# EAGLE board PREAMP_PCB (EAGLE 6.3), part 1 of 3
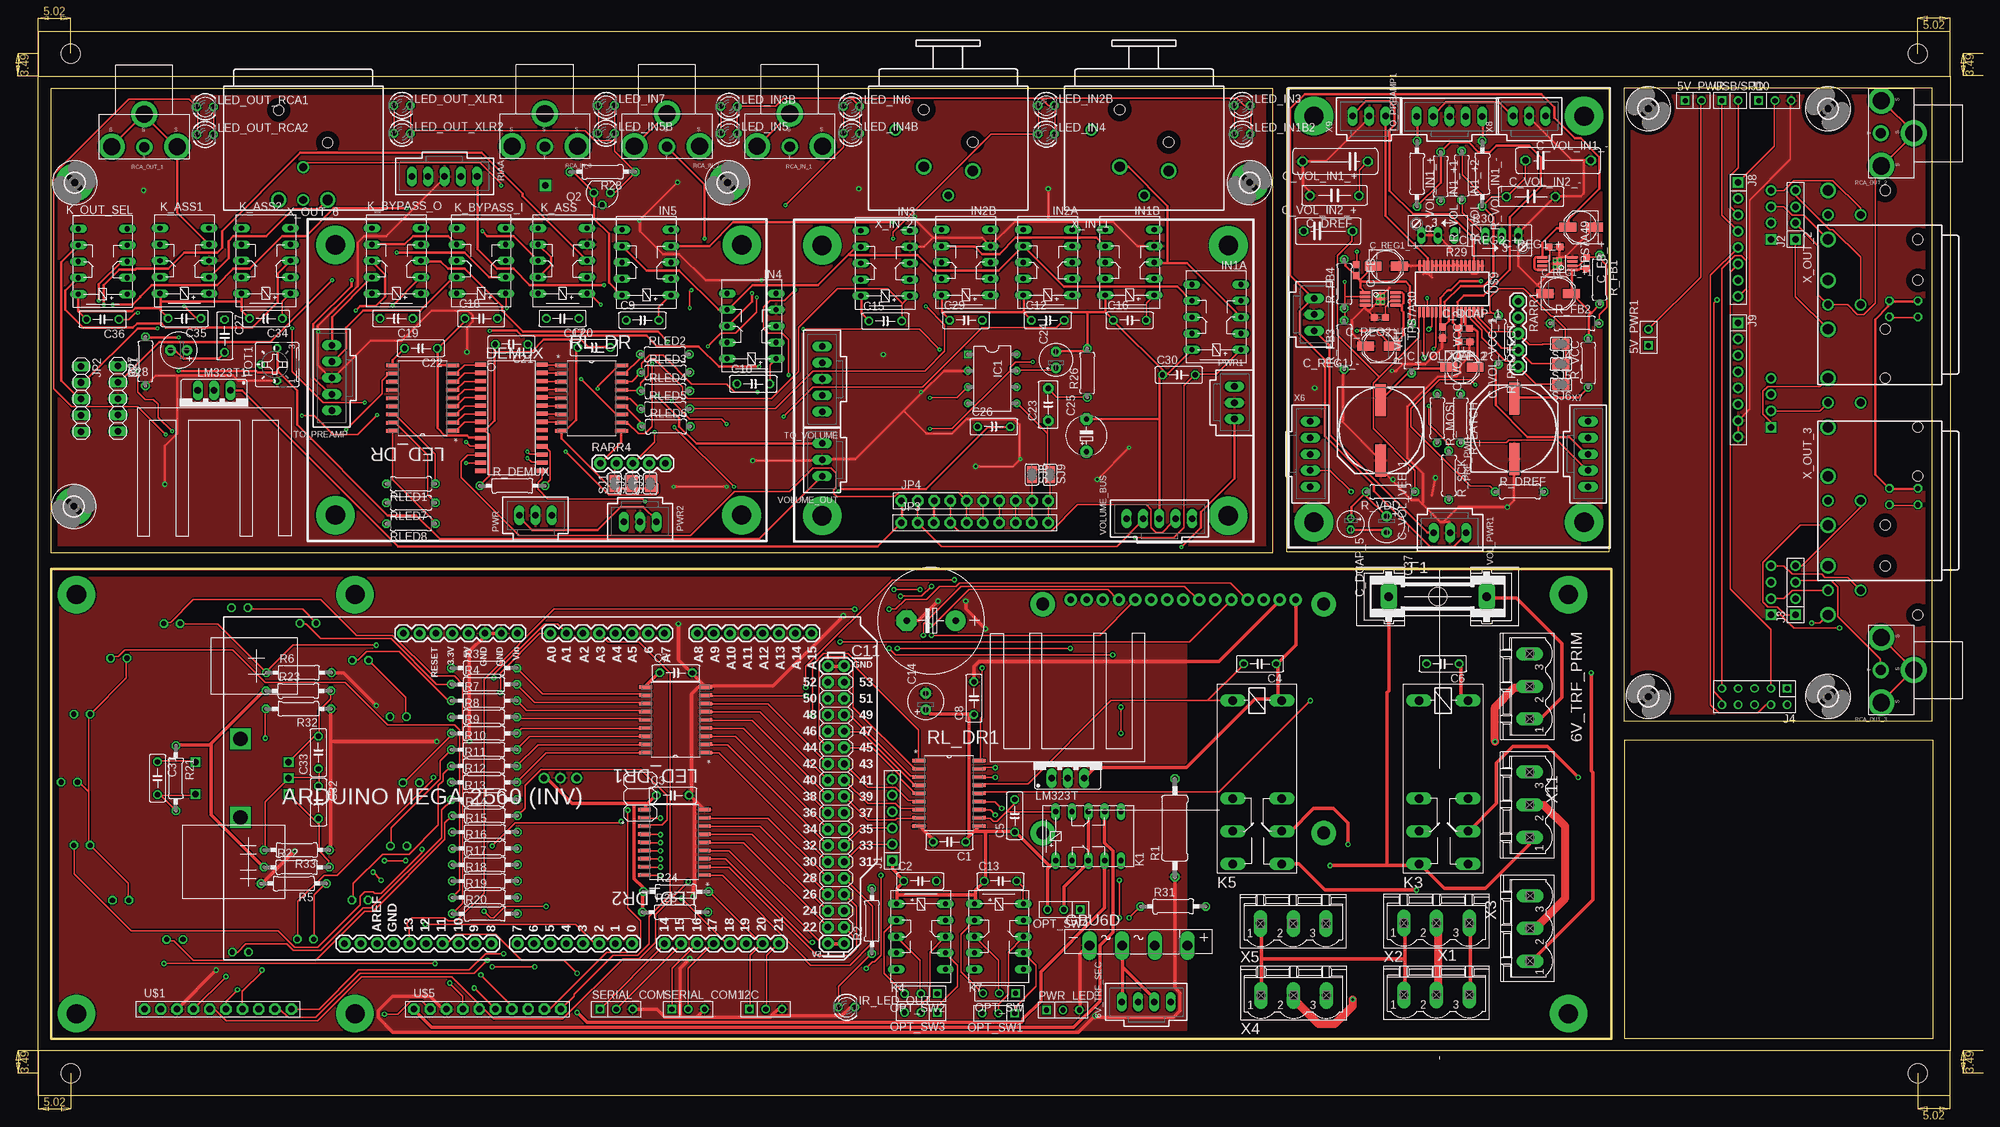
[diagram p0: board, top side]
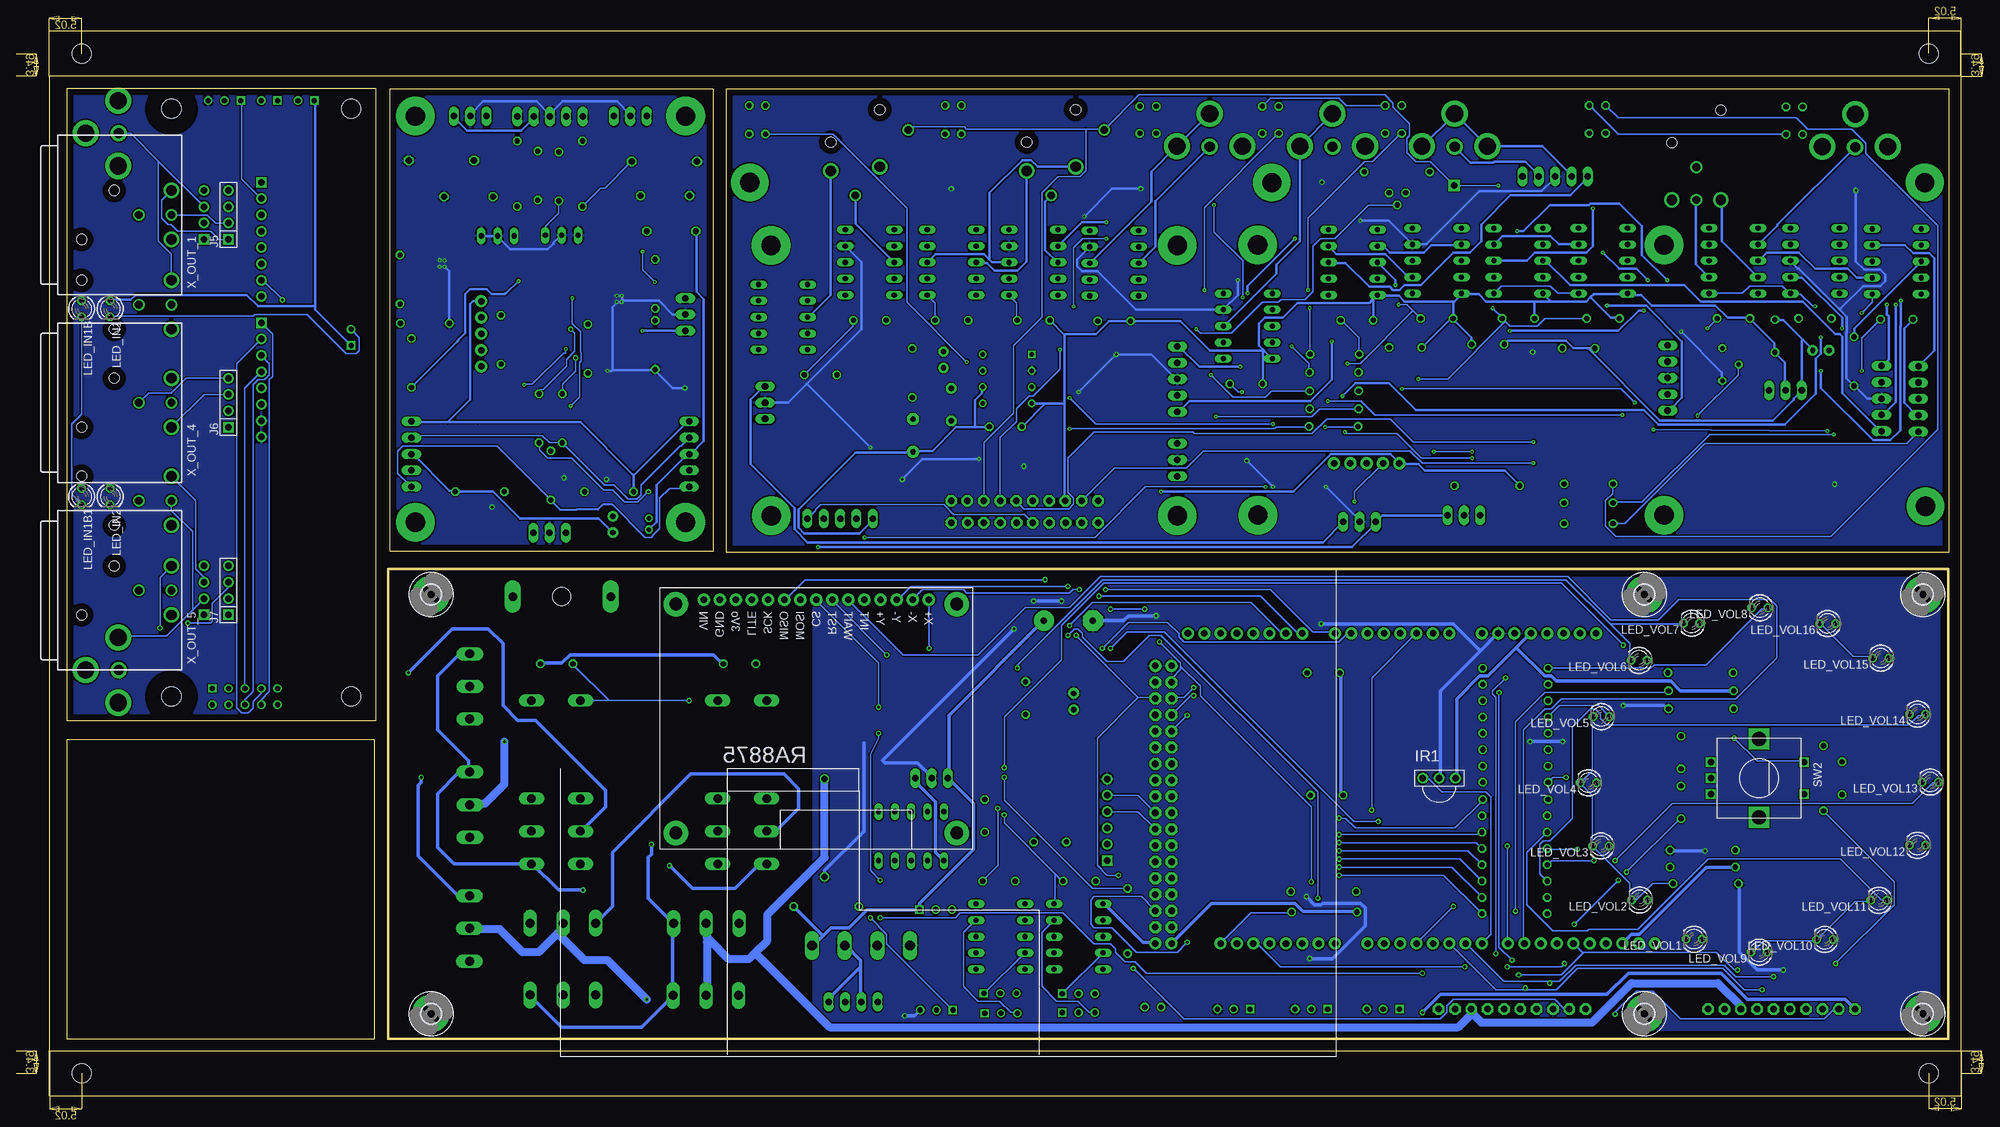
[diagram p1: board, bottom side, seen from below]

Size 297.38 x 165.6 mm. Coordinates in mm from the lower left corner, seen from the top.
Outline: 0.04,158.6 0.04,165.6
Outline: 297.34,158.55 297.34,165.55
Outline: 297.37,0 297.37,7
Outline: 0.01,0 0.01,7
Outline: 0.03,165.58 297.36,165.58
Outline: 297.38,0 0,0
Outline: 244.64,8.89 1.97,8.89 1.97,81.97 244.64,81.97 244.64,8.89
Outline: 246.61,156.72 246.61,58.31 294.54,58.31 294.54,156.72 246.61,156.72
Outline: 1.94,84.5 192.04,84.5 192.04,156.64 1.94,156.64 1.94,84.5
Outline: 194.08,156.65 194.08,84.67 244.37,84.67 244.37,156.65 194.08,156.65
Outline: 0.01,158.59 297.34,158.59 297.34,9.52 297.34,9.27 297.34,7.02 0.01,7.02 0.01,158.59
Outline: 246.74,55.37 294.61,55.37 294.61,9.27 294.61,8.89 246.74,8.89 246.74,55.37
Copper layers (1*16): Top 0.035mm / dielectric 1.5mm / Bottom 0.035mm
Design rules "default": minimum track width 10mil, minimum drill 24mil, track to track 8mil, track to pad 8mil, pad to pad 8mil, via to via 8mil, smd to smd 8mil, copper to edge 40mil, drill to drill 8mil, minimum pad ring 10mil, minimum via ring 8mil, stop-mask expansion 4mil, vias tented up to drill 0mil, thermal gap 10mil
Net classes: 0 default: width 0.203 mm, clearance 0.203 mm; 1 mains: width 0.508 mm, clearance 2.5 mm; 2 earth: width 1.27 mm, clearance 0.508 mm; 3 main2: width 0.508 mm, clearance 1.5 mm; 4 power: width 0.381 mm, clearance 0.203 mm
Holes 3 mm at 5.03,162.13 292.3,162.08 292.28,3.51 5.03,3.53 5.03,3.53

## Footprints (pad centres in the part's own frame; a part is rotated, then mirrored left to right if it is on the bottom)
M1X2 = drill 0.8 square: 1 -1.27,0 | drill 0.8: 2 1.27,0
MSTBV3 = drill 1.397 long: 1 -5.08,0; 2 0,0; 3 5.08,0
70543-04 = drill 1.016 long: 1 -3.81,0; 2 -1.27,0; 3 1.27,0; 4 3.81,0
C050-025X075 = drill 0.813 octagon: 1 -2.54,0; 2 2.54,0
E7,5-16 = drill 1.016 pad 3.15: + -3.81,0 | drill 1.016 pad 3.15 octagon: - 3.81,0
E2,5-6 = drill 0.813 pad 1.6: + -1.27,0 | drill 0.813 pad 1.6 octagon: - 1.27,0
C5B3 = drill 0.813 pad 1.6 octagon: 1 -2.54,0; 2 2.54,0
E2,5-5 = drill 0.813 pad 1.6: + -1.27,0 | drill 0.813 pad 1.6 octagon: - 1.27,0
E5-6 = drill 0.813 pad 1.905: + -2.54,0 | drill 0.813 pad 1.905 octagon: - 2.54,0
C0603 = smd 1.1 x 1: 1 -0.85,0; 2 0.85,0
PANASONIC_C = smd 2.6 x 1.4: + 2.05,0; - -2.05,0
E1,8-4 = drill 0.711 pad 1.168: + -0.889,0 | drill 0.711 pad 1.168 octagon: - 0.889,0
C075-042X103 = drill 0.914 octagon: 1 -3.81,0; 2 3.81,0
C102-043X133 = drill 1.016 octagon: 1 -5.08,0; 2 5.08,0
C075-032X103 = drill 0.914 octagon: 1 -3.81,0; 2 3.81,0
PANASONIC_H13 = smd 5 x 1.6: + 4.7,0; - -4.7,0
SO28W = smd 0.65 x 1.7: 1 -7.62,-4.78; 2 -6.35,-4.78; 3 -5.08,-4.78; 4 -3.81,-4.78; 5 -2.54,-4.78; 6 -1.27,-4.78; 7 0,-4.78; 8 1.27,-4.78; 9 2.54,-4.78; 10 3.81,-4.78; 11 5.08,-4.78; 12 6.35,-4.78; 13 7.62,-4.78; 14 8.89,-4.78; 15 8.89,4.78; 16 7.62,4.78; 17 6.35,4.78; 18 5.08,4.78; 19 3.81,4.78; 20 2.54,4.78; 21 1.27,4.78; 22 0,4.78; 23 -1.27,4.78; 24 -2.54,4.78; 25 -3.81,4.78; 26 -5.08,4.78; 27 -6.35,4.78; 28 -7.62,4.78
GSH15 = drill 1.321 pad 2.54 long: 1 -7.62,0; 2 7.62,0 | hole 2.794: 0,0
GBU4S = drill 1.499 long: + 7.62,0; - -7.62,0; AC1 2.54,0; AC2 -2.54,0
3,0-PAD = drill 3 pad 5.842: B3,0 0,0
3,0 = hole 3: 0,0
M1X3 = drill 0.8 square: 1 0,0 | drill 0.8: 2 2.54,0; 3 5.08,0
DIL08 = drill 0.7 square: 1 -3.81,-3.81 | drill 0.7: 2 -1.27,-3.81; 3 1.27,-3.81; 4 3.81,-3.81; 5 3.81,3.81; 6 1.27,3.81; 7 -1.27,3.81; 8 -3.81,3.81
G6H2-100 = drill 0.813 long: 1 -5.08,-3.81; 5 5.08,-3.81; 6 5.08,3.81; 10 -5.08,3.81; O1 -2.54,-3.81; O2 -2.54,3.81; P1 0,-3.81; P2 0,3.81; S1 2.54,-3.81; S2 2.54,3.81
TSOP17_TB1 = drill 1 pad 1.676: GND 0,-3.81; VO 0,1.27; VS 0,-1.27
LED3MM = drill 0.813 octagon: A -1.27,0; K 1.27,0
M1X6 = drill 1.02 pad 1.632 square: 1 0,0 | drill 1.02 pad 1.632: 2 2.54,0; 3 5.08,0; 4 7.62,0; 5 10.16,0; 6 12.7,0
M1X4 = drill 1.02 pad 1.632 square: 1 0,0 | drill 1.02 pad 1.632: 2 2.54,0; 3 5.08,0; 4 7.62,0
M2X5 = drill 0.8 square: 1 -5.08,-1.27 | drill 0.8: 2 -5.08,1.27; 3 -2.54,-1.27; 4 -2.54,1.27; 5 0,-1.27; 6 0,1.27; 7 2.54,-1.27; 8 2.54,1.27; 9 5.08,-1.27; 10 5.08,1.27
M1X8 = drill 1.02 pad 1.632 square: 1 -8.89,0 | drill 1.02 pad 1.632: 2 -6.35,0; 3 -3.81,0; 4 -1.27,0; 5 1.27,0; 6 3.81,0; 7 6.35,0; 8 8.89,0
1X05 = drill 1.016 long: 1 -5.08,0; 2 -2.54,0; 3 0,0; 4 2.54,0; 5 5.08,0
1X10-BIG = drill 1.016 pad 1.778 octagon: 1 -11.43,0; 2 -8.89,0; 3 -6.35,0; 4 -3.81,0; 5 -1.27,0; 6 1.27,0; 7 3.81,0; 8 6.35,0; 9 8.89,0; 10 11.43,0
F4052 = drill 1.321 long: 1 -3.81,3.81; 2 -3.81,-3.81; O1 11.43,-3.81; O2 11.43,3.81; P1 16.51,-3.81; P2 16.51,3.81; S1 21.59,-3.81; S2 21.59,3.81
SOIC127P1030X265-18N = smd 1.981 x 0.559: 1 -4.674,5.08; 2 -4.674,3.81; 3 -4.674,2.54; 4 -4.674,1.27; 5 -4.674,0; 6 -4.674,-1.27; 7 -4.674,-2.54; 8 -4.674,-3.81; 9 -4.674,-5.08; 10 4.674,-5.08; 11 4.674,-3.81; 12 4.674,-2.54; 13 4.674,-1.27; 14 4.674,0; 15 4.674,1.27; 16 4.674,2.54; 17 4.674,3.81; 18 4.674,5.08
TO220S = drill 1.016 long: 1 -2.54,-2.54; 2 0,-2.54; 3 2.54,-2.54
ARDUINO_MEGA2560_INV = drill 1.016 pad 1.88: 0 63.5,2.54; 1 60.96,2.54; 2 58.42,2.54; 3 55.88,2.54; 3.3V 35.56,50.8; 4 53.34,2.54; 5 50.8,2.54; 5V 38.1,50.8; 5V. 93.98,2.54; 5V.. 96.52,2.54; 6 48.26,2.54; 7 45.72,2.54; 8 41.656,2.54; 9 39.116,2.54; 10 36.576,2.54; 11 34.036,2.54; 12 31.496,2.54; 13 28.956,2.54; 14 68.58,2.54; 15 71.12,2.54; 16 73.66,2.54; 17 76.2,2.54; 18 78.74,2.54; 19 81.28,2.54; 20 83.82,2.54; 21 86.36,2.54; A0 50.8,50.8; A1 53.34,50.8; A2 55.88,50.8; A3 58.42,50.8; A4 60.96,50.8; A5 63.5,50.8; A6 66.04,50.8; A7 68.58,50.8; A8 73.66,50.8; A9 76.2,50.8; A10 78.74,50.8; A11 81.28,50.8; A12 83.82,50.8; A13 86.36,50.8; A14 88.9,50.8; A15 91.44,50.8; AREF 23.876,2.54; GND 26.416,2.54; GND. 43.18,50.8; GND.. 40.64,50.8; GND... 93.98,45.72; GND.... 96.52,45.72; I/OREF 30.48,50.8; N/C 27.94,50.8; RESET 33.02,50.8; SCL1 18.796,2.54; SDA1 21.336,2.54; VIN 45.72,50.8 | drill 1.016 pad 1.88 octagon: 22 93.98,5.08; 23 96.52,5.08; 24 93.98,7.62; 25 96.52,7.62; 26 93.98,10.16; 27 96.52,10.16; 28 93.98,12.7; 29 96.52,12.7; 30 93.98,15.24; 31 96.52,15.24; 32 93.98,17.78; 33 96.52,17.78; 34 93.98,20.32; 35 96.52,20.32; 36 93.98,22.86; 37 96.52,22.86; 38 93.98,25.4; 39 96.52,25.4; 40 93.98,27.94; 41 96.52,27.94; 42 93.98,30.48; 43 96.52,30.48; 44 93.98,33.02; 45 96.52,33.02; 46 93.98,35.56; 47 96.52,35.56; 48 93.98,38.1; 49 96.52,38.1; 50 93.98,40.64; 51 96.52,40.64; 52 93.98,43.18; 53 96.52,43.18
B25P = drill 0.7 octagon: 1 -2.54,0; 2 0,2.54; 3 2.54,0
70543-03 = drill 1.016 long: 1 -2.54,0; 2 0,0; 3 2.54,0
SOT54E = drill 0.813 octagon: D -1.27,0; G 0,1.905; S 1.27,0
0411/15 = drill 0.914 octagon: 1 -7.62,0; 2 7.62,0
0207/10 = drill 0.813 octagon: 1 -5.08,0; 2 5.08,0
0207/7 = drill 0.813 octagon: 1 -3.81,0; 2 3.81,0
RJ9W = drill 0.813 long: A 2.54,0.635; E -2.54,0.635; S 0,0.635
RTH025W = drill 0.813 octagon: 1 -5.08,0; 2 5.08,0
1X05' = drill 1.016 pad 1.88: 1 0,0; 2 2.54,0; 3 5.08,0; 4 7.62,0; 5 10.16,0
MONO_JACK = drill 2.667 pad 4.064: SLEEVE 7.62,0; SLEEVE1 -2.54,0; SLEEVE2 2.54,-5.08 | drill 1.575 pad 2.54: TIP 2.54,0.064
70543-05 = drill 1.016 long: 1 -5.08,0; 2 -2.54,0; 3 0,0; 4 2.54,0; 5 5.08,0
SJ = smd 1.168 x 1.6: 1 -0.762,0; 2 0.762,0
ALPS_EC12E_SW = drill 1 square: A -2.5,-7.5; B 2.5,-7.5; C 0,-7.5; D -2.5,7; E 2.5,7 | drill 2.2 square: GND1 -6.1,0; GND2 6.1,0
CON_PAD_SQUARE_1.02MM = drill 1.02 pad 1.81 square: P 0,0
MSOP8 = smd 0.4 x 1.6: 1 0.295,-1.065; 2 0.945,-1.065; 3 1.595,-1.065; 4 2.245,-1.065; 5 2.245,3.615; 6 1.595,3.615; 7 0.945,3.615; 8 0.295,3.615 | smd 1.89 x 1.372: H 1.27,1.27
RA8875 = drill 1 pad 1.93: 3VO 11.85,1.8; CS 24.35,1.8; GND 9.35,1.8; INT 31.85,1.8; LITE 14.35,1.8; MISO 19.35,1.8; MOSI 21.85,1.8; RST 26.85,1.8; SCK 16.85,1.8; VIN 6.85,1.8; WAIT 29.35,1.8; X+ 41.85,1.8; X- 39.35,1.8; Y+ 34.35,1.8; Y- 36.85,1.8 | drill 2 pad 3.81: P$1 2.5,2.5; P$2 46.2,2.5; P$3 2.5,38.1; P$4 46.2,38.1
UGS = drill 3 pad 6: P$1 23.165,-12.497; P$2 23.19,29.54; P$3 -40.005,29.54; P$4 -40.005,-12.497
SSOP32 = smd 0.4 x 1.5: 1 0.855,-1.085; 2 1.505,-1.085; 3 2.155,-1.085; 4 2.805,-1.085; 5 3.455,-1.085; 6 4.105,-1.085; 7 4.755,-1.085; 8 5.405,-1.085; 9 6.055,-1.085; 10 6.705,-1.085; 11 7.355,-1.085; 12 8.005,-1.085; 13 8.655,-1.085; 14 9.305,-1.085; 15 9.925,-1.085; 16 10.575,-1.085; 17 10.575,6.165; 18 9.94,6.165; 19 9.305,6.165; 20 8.655,6.165; 21 8.005,6.165; 22 7.355,6.165; 23 6.705,6.165; 24 6.055,6.165; 25 5.405,6.165; 26 4.755,6.165; 27 4.105,6.165; 28 3.455,6.165; 29 2.805,6.165; 30 2.155,6.165; 31 1.505,6.165; 32 0.855,6.165
NC3FAH2 = drill 1.6: 1 -3.81,0.635; 2 3.81,0 | drill 1.2: 3 0,-3.815; G -8.25,6.355 | hole 1.6: -3.81,9.525; 3.81,4.445
NC3MBH = drill 1.6: 1 3.81,0; 2 -3.81,0 | drill 1.2: 3 0,0; G 0,5.08 | hole 1.6: -3.81,13.97; 3.81,8.89

## Placement (x,y rotation side)
5V_PWR  5V PWR  [M1X2]  257.4,154.81 0 top
5V_PWR1  5V PWR  [M1X2]  250.42,117.98 90 top
6V_TRF_PRIM  5V_TRF_PRIM  [MSTBV3]  231.94,63.69 90 top
6V_TRF_SEC  6V_TRF_SEC  [70543-04]  172.31,14.61 0 top
C1  100n  [C050-025X075]  141.71,39.5 180 top
C2  100n  [C050-025X075]  137.13,33.4 0 top
C3  100n  [C050-025X075]  98.65,46.74 0 top
C4  100n  [C050-025X075]  189.99,67.18 180 top
C5  100n  [C050-025X075]  151.87,43.56 90 top
C6  100n  [C050-025X075]  218.45,67.18 180 top
C7  100n  [C050-025X075]  99.16,65.79 0 top
C8  100n  [C050-025X075]  145.52,61.85 90 top
C9  100n  [C050-025X075]  93.95,120.65 0 top
C10  100n  [C050-025X075]  111.19,110.75 0 top
C11  4700µ  [E7,5-16]  138.85,73.91 180 top
C12  100n  [C050-025X075]  157,120.65 0 top
C13  100n  [C050-025X075]  149.64,33.4 0 top
C14  470µ  [E2,5-6]  138.02,61.34 90 top
C15  100n  [C050-025X075]  131.73,120.53 0 top
C16  100n  [C050-025X075]  169.73,120.65 0 top
C17  100n  [C050-025X075]  81.53,120.91 180 top
C18  100n  [C050-025X075]  68.86,120.91 0 top
C19  100n  [C050-025X075]  55.68,120.91 180 top
C20  100n  [C050-025X075]  86.41,116.4 0 top
C21  100n  [C050-025X075]  73.58,116.91 180 top
C22  100n  [C050-025X075]  59.49,116.27 180 top
C23  47nF  [C5B3]  157.05,107.53 90 top
C24  1µF  [E2,5-5]  158.27,114.51 90 top
C25  100µF  [E5-6]  163.02,102.72 90 top
C26  100n  [C050-025X075]  148.61,104.1 0 top
C27  100n  [C050-025X075]  28.97,118.21 270 top
C28  470µ  [E2,5-6]  21.82,115.97 180 top
C29  100n  [C050-025X075]  144.27,120.65 0 top
C30  100n  [C050-025X075]  177.38,112.14 0 top
C31  100n  [C050-025X075]  18.53,49.4 270 top
C32  100n  [C050-025X075]  43.55,45.66 270 top
C33  100n  [C050-025X075]  43.55,53.4 90 top
C34  100n  [C050-025X075]  35.39,120.91 180 top
C35  100n  [C050-025X075]  22.72,120.91 180 top
C36  100n  [C050-025X075]  10.01,120.78 180 top
C37  470µ  [E2,5-6]  209.71,88.9 270 top
C_DCAP_1  100n  [C0603]  221.75,119.37 0 top
C_DCAP_2  10µ24V  [PANASONIC_C]  221.43,113.35 0 top
C_DCAP_5  1µ 5V  [E1,8-4]  204.11,88.96 270 top
C_DREF  470n  [C075-042X103]  200.6,134.53 0 top
C_FB_+  10n  [C0603]  240.82,129.54 270 top
C_FB_-  10n  [C0603]  204.98,128.46 270 top
C_REG1_+  10µ24V  [PANASONIC_C]  239.94,135.11 180 top
C_REG1_+1  10µ24V  [PANASONIC_C]  236.37,124.8 0 top
C_REG1_-  10µ24V  [PANASONIC_C]  208.51,116.61 180 top
C_REG1_-1  10µ24V  [PANASONIC_C]  209.65,129.04 0 top
C_REG2_+  10n  [C0603]  235.8,132.05 0 top
C_REG2_-  10n  [C0603]  208.65,121.08 180 top
C_VOL_IN1_+  1n  [C102-043X133]  201.7,145.35 180 top
C_VOL_IN1_-  1n  [C102-043X133]  236.37,145.51 0 top
C_VOL_IN2_+  100p  [C075-032X103]  201.59,140.04 180 top
C_VOL_IN2_-  100p  [C075-032X103]  232.16,139.88 0 top
C_VOL_VCC_1  470µ 24V  [PANASONIC_H13]  229.57,103.78 90 top
C_VOL_VCC_2  100n  [C0603]  218.44,118.76 270 top
C_VOL_VEE_1  470µ 24V  [PANASONIC_H13]  208.78,103.52 270 top
C_VOL_VEE_2  100n  [C0603]  221.78,117.31 180 top
DEMUX  23S17  [SO28W]  73.58,106.11 270 top
F1  300mA  [GSH15]  217.65,77.66 0 top
GBU6D  6A  [GBU4S]  171.11,23.37 0 top
H1  MOUNT-PAD-ROUND3.0  [3,0-PAD]  237.97,77.98 0 bottom
H2  MOUNT-HOLE3.0  [3,0]  278.36,62.1 270 top
H3  MOUNT-PAD-ROUND3.0  [3,0-PAD]  5.94,77.98 0 bottom
H4  MOUNT-HOLE3.0  [3,0]  278.36,153.54 270 top
H5  MOUNT-HOLE3.0  [3,0]  250.42,62.1 270 top
H6  MOUNT-PAD-ROUND3.0  [3,0-PAD]  49.26,12.76 0 bottom
H7  MOUNT-PAD-ROUND3.0  [3,0-PAD]  237.97,12.76 0 bottom
H8  MOUNT-PAD-ROUND3.0  [3,0-PAD]  49.26,77.98 0 bottom
H9  MOUNT-PAD-ROUND3.0  [3,0-PAD]  5.94,12.76 0 bottom
H10  MOUNT-HOLE3.0  [3,0]  250.42,153.54 270 top
H11  MOUNT-PAD-ROUND3.0  [3,0-PAD]  107.2,142.06 0 top
H12  MOUNT-PAD-ROUND3.0  [3,0-PAD]  188.39,142.07 0 top
H13  MOUNT-PAD-ROUND3.0  [3,0-PAD]  5.52,91.69 0 top
H15  MOUNT-PAD-ROUND3.0  [3,0-PAD]  5.65,142.06 0 top
I2C  CON_HEADER_1X03-PTH  [M1X3]  110.59,13.46 0 top
IC1  LM386  [DIL08]  148.35,111.53 270 top
IN1A  IN1A  [G6H2-100]  183.22,121.14 90 top
IN1B  IN1B  [G6H2-100]  169.73,129.65 90 top
IN2A  IN2A  [G6H2-100]  157,129.65 90 top
IN2B  IN2B  [G6H2-100]  144.27,129.65 90 top
IN3  IN3  [G6H2-100]  131.73,129.53 90 top
IN4  IN4  [G6H2-100]  110.94,119.75 90 top
IN5  IN5  [G6H2-100]  94.59,129.65 90 top
IR1  IR  [TSOP17_TB1]  79.91,49.42 270 bottom
IR_LED_OUT  IR out  [LED3MM]  125.7,13.78 0 top
J1  CON_HEADER_1X06-PTH  [M1X6]  132.82,36.58 90 top
J2  CON_HEADER_1X04  [M1X4]  273.28,133.22 90 top
J3  CON_HEADER_1X04  [M1X4]  273.28,74.8 90 top
J4  DAC  [M2X5]  266.93,62.1 180 top
J5  CON_OUT_1  [M1X4]  269.47,133.22 90 bottom
J6  CON_OUT_2  [M1X4]  269.47,104.01 90 bottom
J7  CON_OUT_3  [M1X4]  269.47,74.8 90 bottom
J8  ARD1  [M1X8]  264.39,133.22 270 top
J9  ARD2  [M1X8]  264.39,111.38 270 top
J10  SERIAL  [M1X3]  267.56,154.81 0 top
JP1  OUT/IN SELECTED  [1X05]  12.37,108.46 270 top
JP2  OUTPUT  [1X05]  6.65,108.41 270 top
JP3  PINHD-1X10  [1X10-BIG]  145.64,89.15 0 top
JP4  PINHD-1X10  [1X10-BIG]  145.67,92.56 0 top
K1  G6H2-100  [G6H2-100]  163.3,40.39 0 top
K3  4052  [F4052]  218.54,57.66 270 top
K4  G6H2-100  [G6H2-100]  137.26,24.77 270 top
K5  4052  [F4052]  189.59,57.66 270 top
K7  G6H2-100  [G6H2-100]  149.39,24.77 270 top
K_ASS  K_ASS_I  [G6H2-100]  81.53,129.91 90 top
K_ASS1  K_ASS_O_GND  [G6H2-100]  22.72,129.91 90 top
K_ASS2  K_ASS_O  [G6H2-100]  35.39,129.91 90 top
K_BYPASS_I  BYPASS_I  [G6H2-100]  68.86,129.91 90 top
K_BYPASS_O  BYPASS_O  [G6H2-100]  55.68,129.91 90 top
K_OUT_SEL  K_OUT_SEL  [G6H2-100]  10.01,129.79 90 top
LED_DR  2803  [SOIC127P1030X265-18N]  59.74,108.52 180 top
LED_DR1  2803  [SOIC127P1030X265-18N]  99.1,58.48 180 top
LED_DR2  2803  [SOIC127P1030X265-18N]  98.91,39.43 180 top
LED_IN1  [LED3MM]  287.88,122.43 270 bottom
LED_IN1B  [LED3MM]  292.33,122.43 270 bottom
LED_IN1B1  [LED3MM]  292.33,93.22 270 bottom
LED_IN1B2  [LED3MM]  187.24,149.61 0 top
LED_IN2  [LED3MM]  287.88,93.22 270 bottom
LED_IN2B  [LED3MM]  156.76,154.05 0 top
LED_IN3  [LED3MM]  187.24,154.05 0 top
LED_IN3B  [LED3MM]  107.42,153.92 0 top
LED_IN4  [LED3MM]  156.76,149.61 0 top
LED_IN4B  [LED3MM]  126.47,149.73 0 top
LED_IN5  [LED3MM]  107.42,149.73 0 top
LED_IN5B  [LED3MM]  88.3,149.73 0 top
LED_IN6  [LED3MM]  126.47,153.92 0 top
LED_IN7  [LED3MM]  88.3,154.05 0 top
LED_OUT_RCA1  [LED3MM]  25.95,153.86 0 top
LED_OUT_RCA2  [LED3MM]  25.95,149.54 0 top
LED_OUT_XLR1  [LED3MM]  56.55,154.05 0 top
LED_OUT_XLR2  [LED3MM]  56.55,149.73 0 top
LED_VOL1  [LED3MM]  41.54,24.35 180 bottom
LED_VOL2  [LED3MM]  50.01,30.45 180 bottom
LED_VOL3  [LED3MM]  56.02,38.86 180 bottom
LED_VOL4  [LED3MM]  57.95,48.68 180 bottom
LED_VOL5  [LED3MM]  55.97,58.97 180 bottom
LED_VOL6  [LED3MM]  50.09,67.72 180 bottom
LED_VOL7  [LED3MM]  41.92,73.51 180 bottom
LED_VOL8  [LED3MM]  31.29,75.91 180 bottom
LED_VOL9  [LED3MM]  31.42,22.34 180 bottom
LED_VOL10  [LED3MM]  21.22,24.32 180 bottom
LED_VOL11  [LED3MM]  12.8,30.4 180 bottom
LED_VOL12  [LED3MM]  6.79,38.96 180 bottom
LED_VOL13  [LED3MM]  4.81,48.8 180 bottom
LED_VOL14  [LED3MM]  6.79,59.37 180 bottom
LED_VOL15  [LED3MM]  12.52,68.07 180 bottom
LED_VOL16  [LED3MM]  20.77,73.46 180 bottom
LM323T  5V REG  [TO220S]  160.12,51.94 0 top
LM323T1  5V REG  [TO220S]  27.32,107.19 180 top
OPT_SW  CON_HEADER_1X03-PTH  [M1X3]  151.99,15.94 180 top
OPT_SW1  CON_HEADER_1X03-PTH  [M1X3]  151.87,12.83 180 top
OPT_SW2  CON_HEADER_1X03-PTH  [M1X3]  139.8,15.88 180 top
OPT_SW3  CON_HEADER_1X03-PTH  [M1X3]  139.8,12.95 180 top
OPT_SW4  CON_HEADER_1X03-PTH  [M1X3]  162.03,28.96 180 top
PCB2  ARDUINO_MEGA2560_INV  [ARDUINO_MEGA2560_INV]  28.81,21.15 0 top
POT1  500k  [B25P]  37.13,113.76 90 top
PRE_PWR  TO_PRE_PWR  [70543-03]  198.41,121.54 270 top
PWR  PWR  [70543-03]  77.32,90.3 0 top
PWR1  PWR  [70543-03]  186.03,107.82 270 top
PWR2  PWR  [70543-03]  93.57,89.28 180 top
PWR_LED  CON_HEADER_1X03-PTH  [M1X3]  156.82,13.34 0 top
Q2  BS170  [SOT54E]  87.68,140.49 180 top
R1  10R 1W  [0411/15]  176.76,41.66 90 top
R2  330  [0207/10]  129.64,27.18 90 top
R3  1k  [0207/10]  69.32,66.55 0 top
R4  1k  [0207/10]  69.32,64.01 0 top
R5  10k  [0207/10]  39.73,33.02 180 top
R6  10k  [0207/10]  40.53,65.82 0 top
R7  1k  [0207/10]  69.32,61.47 0 top
R8  1k  [0207/10]  69.32,58.93 0 top
R9  1k  [0207/10]  69.32,56.39 0 top
R10  1k  [0207/10]  69.32,53.85 0 top
R11  1k  [0207/10]  69.32,51.31 0 top
R12  1k  [0207/10]  69.32,48.77 0 top
R13  1k  [0207/10]  69.32,46.1 0 top
R14  1k  [0207/10]  69.44,43.56 0 top
R15  1k  [0207/10]  69.44,41.02 0 top
R16  1k  [0207/10]  69.44,38.48 0 top
R17  1k  [0207/10]  69.44,35.94 0 top
R18  1k  [0207/10]  69.44,33.4 0 top
R19  1k  [0207/10]  69.44,30.86 0 top
R20  1k  [0207/10]  69.44,28.32 0 top
R21  10k  [0207/10]  21.39,49.4 270 top
R22  10k  [0207/10]  40.18,35.56 0 top
R23  10k  [0207/10]  40.44,62.99 0 top
R24  10k  [0207/10]  99.16,31.75 0 top
R25  10k  [0207/10]  99.03,28.57 0 top
R26  10  [0207/7]  163.13,112.44 90 top
R27  500k  [0207/7]  16.65,114.26 90 top
R28  10k PWM  [0207/10]  87.73,143.74 180 top
R29  20k  [RJ9W]  217.66,134.51 180 top
R30  20k  [RJ9W]  227.62,133.14 0 top
R31  1k  [0207/10]  176.5,29.46 0 top
R32  330  [0207/10]  40.44,60.2 180 top
R33  330  [0207/10]  40.18,38.23 180 top
R_DEMUX  10k  [RTH025W]  73.71,94.89 0 top
R_DREF  10k  [0207/7]  230.42,93.98 0 top
R_FB1  1,17M  [0207/7]  242.8,126.98 270 top
R_FB2  100k  [0207/7]  238.93,120.17 0 top
R_FB3  100k  [0207/7]  203.13,116.79 90 top
R_FB4  1,17M  [0207/7]  203.12,126.31 90 top
R_LATCH  100  [0207/7]  221.19,105.38 270 top
R_MOSI  100  [0207/7]  217.57,105.41 270 top
R_PROTECT  100  [0207/7]  227.09,117.63 270 top
R_SCK  100  [0207/7]  219.38,96.5 270 top
R_VCC  1  [0207/7]  241.05,114 90 top
R_VDD  10k  [0207/7]  210.3,93.97 180 top
R_VEE  1  [0207/7]  213.57,116.23 90 top
R_VOL_IN1_+  470  [0207/10]  214.43,143.45 270 top
R_VOL_IN1_+1  20k  [0207/7]  218.11,143.03 270 top
R_VOL_IN1_+2  20k  [0207/7]  221.39,143.15 270 top
R_VOL_IN1_-  470  [0207/10]  224.58,143.45 270 top
RARR1  10k  [1X05']  230.16,123.62 270 top
RARR4  10k  [1X05']  87.37,98.4 0 top
RCA_IN_1  IN1  [MONO_JACK]  119.42,147.7 180 top
RCA_IN_2  IN2  [MONO_JACK]  100.3,147.7 180 top
RCA_IN_3  IN3_RIAA  [MONO_JACK]  81.32,147.7 180 top
RCA_OUT_1  OUT1  [MONO_JACK]  19.02,147.64 180 top
RCA_OUT_2  OUT_L  [MONO_JACK]  286.61,147.19 90 top
RCA_OUT_3  OUT_R  [MONO_JACK]  286.61,63.69 90 top
RIAA  TO_RIAA  [70543-05]  63.16,143 180 top
RL_DR  2803  [SOIC127P1030X265-18N]  86.03,108.52 0 top
RL_DR1  2803  [SOIC127P1030X265-18N]  141.64,47.05 0 top
RLED1  45 LED  [0207/7]  57.95,95.18 180 top
RLED2  45 LED  [0207/7]  97.45,115.37 0 top
RLED3  45 LED  [0207/7]  97.55,112.53 0 top
RLED4  45 LED  [0207/7]  97.51,109.63 0 top
RLED5  45 LED  [0207/7]  97.51,106.86 0 top
RLED6  45 LED  [0207/7]  97.61,104.11 0 top
RLED7  45 LED  [0207/7]  57.95,92.22 180 top
RLED8  45 LED  [0207/7]  57.95,89.01 180 top
SERIAL_COM  CON_HEADER_1X03-PTH  [M1X3]  87.35,13.46 0 top
SERIAL_COM1  CON_HEADER_1X03-PTH  [M1X3]  98.53,13.46 0 top
SJ1  A0  [SJ]  89.62,95.24 90 top
SJ2  A1  [SJ]  92.39,95.24 90 top
SJ3  A2  [SJ]  95.17,95.24 90 top
SJ4  ADR0  [SJ]  236.79,116.97 180 top
SJ5  ADR1  [SJ]  236.79,113.8 180 top
SJ6  ADR2  [SJ]  236.79,110.62 180 top
SJ8  A0  [SJ]  154.53,96.63 270 top
SJ9  A0  [SJ]  157.33,96.63 270 top
SW2  EC12E_SW  [ALPS_EC12E_SW]  31.42,49.4 270 bottom
T1  PAD_TERMINAL-1.02MM_SQUARE  [CON_PAD_SQUARE_1.02MM]  78.84,141.6 0 top
TO_PREAMP  TO_PREAMP  [70543-05]  45.62,111.68 90 top
TO_PREAMP1  TO_PREAMP  [70543-05]  219.47,152.34 0 top
TO_VOLUME  TO_VOLUME  [70543-05]  121.89,111.51 90 top
TPS7A30  TPS7A30  [MSOP8]  207.44,125.24 270 top
TPS7A49  TPS7A49  [MSOP8]  237.52,128.19 90 top
U$1  RELAY BOARD  [1X10-BIG]  27.91,13.46 0 top
U$2  HEATSINK  [HEATSINK]  160.12,51.94 180 top
U$3  RA8875  [RA8875]  202.41,78.99 180 top
U$4  5"TFT  [5_TFT]  217.91,81.91 180 top
U$5  RELAY BOARD  [1X10-BIG]  69.82,13.46 0 top
U$6  UGS  [UGS]  86.21,102.83 0 top
U$7  HEATSINK  [HEATSINK]  27.34,107.09 0 top
U$8  UGS  [UGS]  161.9,102.74 0 top
U$9  MUSES72320  [SSOP32]  225.43,128.07 180 top
U$10  UGS  [UGS]  210.88,112.39 270 top
USB/SPD  IN_SEL  [M1X2]  263.12,154.81 0 top
VOL_PWR1  PWR_IN  [70543-03]  219.55,87.58 180 top
VOLUME_BUS  VOLUME_BUS  [70543-05]  174.35,89.79 0 top
VOLUME_OUT  VOLUME_OUT  [70543-03]  121.89,98.93 90 top
X1  220V PR13  [MSTBV3]  217.46,15.68 0 top
X2  220V PR14  [MSTBV3]  217.46,26.86 0 top
X3  220V PR2  [MSTBV3]  232,26.04 90 top
X4  220V PR11  [MSTBV3]  195.24,15.62 0 top
X5  220V PR12  [MSTBV3]  195.17,26.8 0 top
X6  PWR+SPI  [70543-05]  197.84,99.82 270 top
X7  PWR+SPI  [70543-05]  241.02,99.82 270 top
X8  INPUT  [70543-03]  231.88,152.4 0 top
X9  OUTPUT  [70543-03]  206.98,152.4 0 top
X11  220V AC IN  [MSTBV3]  231.94,45.28 90 top
X_IN_1  X_IN_1  [NC3FAH2]  172,143.89 0 top
X_IN_2  X_IN_2  [NC3FAH2]  141.52,143.89 0 top
X_OUT_1  OUT_1  [NC3MBH]  278.36,137.03 90 bottom
X_OUT_2  OUT_S_L  [NC3MBH]  278.36,123.06 270 top
X_OUT_3  OUT_S_R  [NC3MBH]  278.36,92.58 270 top
X_OUT_4  OUT_2  [NC3MBH]  278.36,107.82 90 bottom
X_OUT_5  OUT_3  [NC3MBH]  278.36,78.61 90 bottom
X_OUT_6  X_OUT  [NC3MBH]  41.19,139.38 0 top

## Library data of the parts
5V_PWR 5V_PWR1 J4 J8-J10 T1 USB/SPD = dp_devices
6V_TRF_PRIM X1-X5 X11 = con-phoenix-508; MPN: MSTBV 2,5/3-GF-5.08; OC_FARNELL: 1792793; OC_NEWARK: 69R9846
6V_TRF_SEC PRE_PWR PWR PWR1 PWR2 RIAA TO_PREAMP TO_PREAMP1 TO_VOLUME VOL_PWR1 VOLUME_BUS VOLUME_OUT X6-X9 = con-molex; OC_FARNELL: unknown; OC_NEWARK: unknown
C1-C22 C24-C37 C_DCAP_1 C_DCAP_2 C_DCAP_5 C_DREF C_FB_+ C_FB_- C_REG1_+ C_REG1_+1 C_REG1_- C_REG1_-1 C_REG2_+ C_REG2_- C_VOL_IN1_+ C_VOL_IN1_- C_VOL_IN2_+ C_VOL_IN2_- C_VOL_VCC_2 C_VOL_VEE_2 R1-R28 R31-R33 R_DREF R_FB1-R_FB4 R_LATCH R_MOSI R_PROTECT R_SCK R_VCC R_VDD R_VEE R_VOL_IN1_+ R_VOL_IN1_+1 R_VOL_IN1_+2 R_VOL_IN1_- RLED1-RLED8 = rcl
C23 = capacitor-wima
C_VOL_VCC_1 C_VOL_VEE_1 RARR1 RARR4 = SparkFun
DEMUX = microchip; MF: MICROCHIP; MPN: MCP23S17-E/SO; OC_FARNELL: unknown; OC_NEWARK: 31K2950
F1 = fuse; MPN: 64900001039; OC_FARNELL: 1271673; OC_NEWARK: 02P0318
GBU6D = rectifier
H1-H13 H15 = holes
I2C J1-J3 J5-J7 OPT_SW OPT_SW1-OPT_SW4 PWR_LED R_DEMUX SERIAL_COM SERIAL_COM1 = dp_devices.v6
IC1 = gm-ics
IN1A IN1B IN2A IN2B IN3-IN5 K1 K3-K5 K7 K_ASS K_ASS1 K_ASS2 K_BYPASS_I K_BYPASS_O K_OUT_SEL = relay; OC_FARNELL: unknown; OC_NEWARK: unknown
IR1 = telefunken; OC_FARNELL: unknown; OC_NEWARK: unknown
IR_LED_OUT LED_IN1 LED_IN1B LED_IN1B1 LED_IN1B2 LED_IN2 LED_IN2B LED_IN3 LED_IN3B LED_IN4 LED_IN4B LED_IN5 LED_IN5B LED_IN6 LED_IN7 LED_OUT_RCA1 LED_OUT_RCA2 LED_OUT_XLR1 LED_OUT_XLR2 LED_VOL1-LED_VOL16 = led; MF: VISHAY SEMICONDUCTOR; OC_FARNELL: 1612435
JP1 JP2 = pinhead
JP3 JP4 U$1 U$5 = adafruit
LED_DR LED_DR1 LED_DR2 RL_DR RL_DR1 = uln-udn; MPN: ULN2803ADWR; OC_FARNELL: 1652420; OC_NEWARK: 87H4769; PACKAGE: SOIC-18; SUPPLIER: TEXAS INSTRUMENTS
LM323T LM323T1 = v-reg
PCB2 = E14_Arduino_revB
POT1 = gm-pots
Q2 = transistor-small-signal
R29 R30 = pot
RCA_IN_1-RCA_IN_3 RCA_OUT_1-RCA_OUT_3 = 00_steve
SJ1-SJ6 SJ8 SJ9 = jumper
SW2 = switch-alps; MPN: EC12E2424407; OC_FARNELL: 1520813; OC_NEWARK: 74M1068
TPS7A30 TPS7A49 U$2-U$4 U$6-U$10 = gael
X_IN_1 X_IN_2 = con-neutrik_ag; MPN: NC3FAH2; OC_FARNELL: unknown; OC_NEWARK: 27B4208
X_OUT_1-X_OUT_6 = con-neutrik_ag; MF: NEUTRIK; MPN: NC3MBH; OC_FARNELL: unknown; OC_NEWARK: 91F3470

## Nets
44.1KHZ: J4.10 J8.7
48KHZ: J4.9 J8.8
88.2KHZ: J4.8 J9.1
96KHZ: J4.7 J9.2
176.4KHZ: J4.6 J9.3
192KHZ: J4.5 J9.4
+5V [power]: C1.1 C2.1 C3.1 C4.1 C5.1 C6.1 C7.1 C8.1 C13.1 C14.+ IR1.VO J1.1 K1.1 K3.1 K4.1 K5.1 K7.1 LED_DR1.10 LED_DR2.10 LM323T.3 OPT_SW4.3 PCB2.5V PCB2.5V. PCB2.5V.. PCB2.AREF R21.1 R22.1 R23.1 R24.1 R25.1 RL_DR1.10 U$3.VIN
+5V1 [power]: 5V_PWR1.1 5V_PWR.1 LED_IN1.A LED_IN1B1.A LED_IN1B.A LED_IN2.A
+5V2 [power]: C20.2 C21.2 C22.2 C25.+ C26.2 C27.1 C28.+ DEMUX.9 IC1.6 LED_DR.10 LM323T1.3 R_DEMUX.1 RARR4.1 RL_DR.10 VOLUME_BUS.1
+5V3 [power]: C37.+ C_DCAP_5.+ R_VDD.2 RARR1.1 X6.1 X7.1
+5V_RAW [power]: JP3.1 JP4.1 LM323T1.1
A_VCC [power]: C_FB_+.2 C_REG1_+1.+ R_FB1.2 R_VCC.2 TPS7A49.1
A_VEE [power]: C_FB_-.2 C_REG1_-1.- R_FB4.2 R_VEE.2 TPS7A30.1
AUDIOSTREAM: J4.3 J8.6
BYPASS+ [power]: K_BYPASS_I.S1 K_BYPASS_O.S1
BYPASS- [power]: K_BYPASS_I.S2 K_BYPASS_O.S2
EARTH [earth]: 6V_TRF_PRIM.2 R1.2 U$1.8 U$5.8 X1.2 X2.2 X3.2 X4.2 X5.2 X11.2
EARTH1: JP3.8 JP4.8 T1.P X_IN_1.G X_IN_2.G X_OUT_6.G
GND [power]: C1.2 C3.2 C7.2 C8.2 C11.- C14.- GBU6D.- I2C.3 IR1.VS IR_LED_OUT.K J1.6 LED_DR1.9 LED_DR2.9 LM323T.2 PCB2.GND. PCB2.GND.. PCB2.GND... PCB2.GND.... PWR_LED.3 R1.1 R5.2 R6.2 R32.1 R33.1 RL_DR1.9 SERIAL_COM1.3 SERIAL_COM.3 U$1.3 U$3.GND U$5.3
GND1 [power]: C9.1 C10.1 C12.1 C15.1 C16.1 C17.2 C18.1 C19.2 C20.1 C21.1 C22.1 C24.- C25.- C26.1 C27.2 C28.- C29.1 C30.1 C34.2 C35.2 C36.2 DEMUX.10 IC1.4 IN1A.10 IN1B.10 IN2A.10 IN2B.10 IN3.10 IN4.10 IN5.10 JP2.4 JP3.3 JP4.3 K_ASS1.10 K_ASS2.10 K_ASS.10 K_BYPASS_I.10 K_BYPASS_O.10 K_OUT_SEL.10 LED_DR.9 LM323T1.2 Q2.S R26.2 R28.2 RL_DR.9 SJ1.1 SJ2.1 SJ3.1 VOLUME_BUS.3
GND2 [power]: C37.- C_DCAP_5.- C_DREF.1 R_DREF.2 R_PROTECT.2 X6.3 X7.3
GND_5V: J9.7 J9.8 J10.3
GND_AUDIO [power]: IC1.2 IN1B.S1 IN2B.S1 IN3.S1 IN4.S1 JP1.3 K_ASS1.P1 K_ASS.S1 POT1.1 PWR1.2 PWR2.2 PWR.2 R27.1 RIAA.3 TO_PREAMP.3 TO_VOLUME.3 VOLUME_OUT.2
GND_AUDIO1 [power]: C_REG1_+1.- C_REG1_+.- C_REG1_-1.+ C_REG1_-.+ C_REG2_+.2 C_REG2_-.2 C_VOL_IN1_+.2 C_VOL_IN1_-.2 C_VOL_IN2_+.2 C_VOL_IN2_-.2 C_VOL_VCC_1.- C_VOL_VCC_2.2 C_VOL_VEE_1.+ C_VOL_VEE_2.1 PRE_PWR.2 R29.A R29.S R30.A R30.S R_FB2.1 R_FB3.1 TO_PREAMP1.3 TPS7A30.4 TPS7A30.H TPS7A49.4 TPS7A49.H U$9.1 U$9.2 U$9.4 U$9.5 U$9.6 U$9.7 U$9.8 U$9.9 U$9.10 U$9.11 U$9.12 U$9.13 U$9.15 U$9.16 VOL_PWR1.2 X8.2 X9.2
GND_IN_RIAA [power]: RCA_IN_3.SLEEVE RCA_IN_3.SLEEVE1 RCA_IN_3.SLEEVE2 RIAA.4
GND_OUT_ASSYM [power]: K_ASS1.S1 RCA_OUT_1.SLEEVE RCA_OUT_1.SLEEVE1 RCA_OUT_1.SLEEVE2
GND_OUT_SYM [power]: JP2.2 K_ASS1.O1 X_OUT_6.1
HOST_ACTIVE: J4.4 J8.5
IN_SYM+ [power]: IN1A.S2 IN2A.S2 IN3.S2 IN4.S2 IN5.S2 K_ASS.O2 K_ASS.S2
IN_SYM- [power]: IN1B.S2 IN2B.S2 IN5.S1 K_ASS.O1
IN_VOL+ [power]: K_BYPASS_O.P1 TO_VOLUME.1
IN_VOL- [power]: K_BYPASS_O.P2 TO_VOLUME.5
IO22: LED_DR2.5 PCB2.22
IO23: LED_DR2.4 PCB2.23
IO24: LED_DR2.6 PCB2.24
IO25: LED_DR2.3 PCB2.25
IO26: LED_DR2.7 PCB2.26
IO27: LED_DR2.2 PCB2.27
IO28: LED_DR2.8 PCB2.28
IO29: LED_DR2.1 PCB2.29
IO30: LED_DR1.1 PCB2.30
IO31: J1.2 PCB2.31
IO32: LED_DR1.2 PCB2.32
IO33: J1.3 PCB2.33
IO34: LED_DR1.3 PCB2.34
IO35: J1.4 PCB2.35
IO36: LED_DR1.4 PCB2.36
IO37: J1.5 PCB2.37
IO38: LED_DR1.5 PCB2.38
IO39: PCB2.39 RL_DR1.8
IO40: LED_DR1.6 PCB2.40
IO41: PCB2.41 RL_DR1.7
IO42: LED_DR1.7 PCB2.42
IO43: PCB2.43 RL_DR1.6
IO44: PCB2.44 RL_DR1.2
IO45: PCB2.45 RL_DR1.5
IO46: PCB2.46 RL_DR1.1
IO47: PCB2.47 RL_DR1.4
IO48: LED_DR1.8 PCB2.48
IO49: PCB2.49 RL_DR1.3
IR_IN: IR1.GND PCB2.7
JHGCD: R_PROTECT.1 SJ4.1 SJ5.1 SJ6.1 U$9.32
L+: J2.3 RCA_OUT_2.TIP X_OUT_2.2
L+1: J5.3 X_OUT_1.2
L+2: J6.3 X_OUT_4.2
L+3: J7.3 X_OUT_5.2
L-: J2.2 RCA_OUT_2.SLEEVE RCA_OUT_2.SLEEVE1 RCA_OUT_2.SLEEVE2 X_OUT_2.3
L-1: J5.2 X_OUT_1.3
L-2: J6.2 X_OUT_4.3
L-3: J7.2 X_OUT_5.3
L_GND: J2.1 X_OUT_2.1
L_GND1: J5.1 X_OUT_1.1
L_GND2: J6.1 X_OUT_4.1
L_GND3: J7.1 X_OUT_5.1
LED1: LED_IN1B2.A LED_IN3.A RLED6.2
LED2: LED_IN2B.A LED_IN4.A RLED5.2
LED3: LED_IN3B.A LED_IN5.A RLED4.2
LED4: LED_IN4B.A LED_IN6.A RLED3.2
LED5: LED_IN5B.A LED_IN7.A RLED2.2
LED6: LED_OUT_XLR1.A LED_OUT_XLR2.A RLED1.2
LED7: LED_OUT_RCA1.A LED_OUT_RCA2.A RLED7.2
LED8: JP2.5 RLED8.2
LED_GND: 5V_PWR1.2 5V_PWR.2 LED_IN1.K LED_IN1B1.K LED_IN1B.K LED_IN2.K
LED_PWM_GND: LED_IN1B2.K LED_IN2B.K LED_IN3.K LED_IN3B.K LED_IN4.K LED_IN4B.K LED_IN5.K LED_IN5B.K LED_IN6.K LED_IN7.K LED_OUT_RCA1.K LED_OUT_RCA2.K LED_OUT_XLR1.K LED_OUT_XLR2.K Q2.D R28.1
MAINS_L [mains]: F1.1 K3.S1 K5.S1 X11.1
MAINS_N [mains]: 6V_TRF_PRIM.3 K3.S2 K5.S2 X11.3
MISO: PCB2.50 U$3.MISO
MOSI: PCB2.51 U$1.2 U$3.MOSI U$5.2
MOSI1: DEMUX.13 JP3.2 JP4.2 VOLUME_BUS.2
MOSI2: R_MOSI.2 X6.2 X7.2
MUX_CS: PCB2.5 U$1.6 U$5.6
MUX_CS1: DEMUX.11 JP3.6 JP4.6
N$1: K4.P1 OPT_SW2.2
N$2: R2.2 RL_DR1.16
N$3: IR_LED_OUT.A R2.1
N$4: LED_VOL1.A R12.1
N$5: PCB2.14 SERIAL_COM.1
N$6: PCB2.15 SERIAL_COM.2
N$7: LED_VOL1.K LED_VOL2.K LED_VOL3.K LED_VOL4.K LED_VOL5.K LED_VOL6.K LED_VOL7.K LED_VOL8.K R5.1 RL_DR1.18
N$8: K4.S1 OPT_SW2.1
N$9: K4.O1 OPT_SW2.3
N$10: LED_VOL2.A R11.1
N$11: K7.P2 OPT_SW1.2
N$12: LED_VOL3.A R10.1
N$13: LED_VOL4.A R9.1
N$14: LED_VOL5.A R8.1
N$15: LED_VOL6.A R7.1
N$16: LED_VOL7.A R4.1
N$17: LED_VOL8.A R3.1
N$18: LED_DR2.11 R13.2
N$19: LED_DR2.12 R14.2
N$20: LED_VOL9.K LED_VOL10.K LED_VOL11.K LED_VOL12.K LED_VOL13.K LED_VOL14.K LED_VOL15.K LED_VOL16.K R6.1 RL_DR1.17
N$21: LED_DR2.13 R15.2
N$22: LED_DR2.14 R16.2
N$23: LED_DR2.15 R17.2
N$24: LED_DR2.16 R18.2
N$25: LED_DR2.17 R19.2
N$26: LED_DR2.18 R20.2
N$27: K7.S2 OPT_SW1.1
N$28: LED_DR1.11 R3.2
N$29: LED_DR1.12 R4.2
N$30: K4.P2 OPT_SW3.2
N$31: LED_DR1.13 R7.2
N$32: K7.P1 OPT_SW.2
N$33: LED_DR1.14 R8.2
N$34: LED_DR1.15 R9.2
N$35: LED_DR1.16 R10.2
N$36: LED_DR1.17 R11.2
N$37: LED_DR1.18 R12.2
N$38 [power]: 6V_TRF_SEC.2 6V_TRF_SEC.4 GBU6D.AC1
N$39 [power]: 6V_TRF_SEC.1 6V_TRF_SEC.3 GBU6D.AC2
N$40: K7.O2 OPT_SW1.3
N$41: LED_VOL9.A R13.1
N$42: LED_VOL10.A R14.1
N$43: LED_VOL11.A R15.1
N$44 [power]: IN3.P1 RCA_IN_1.SLEEVE RCA_IN_1.SLEEVE1 RCA_IN_1.SLEEVE2
N$45 [power]: IN1A.P2 X_IN_1.2
N$46 [power]: IN1B.P2 X_IN_1.3
N$47: DEMUX.8 LED_DR.1
N$48: DEMUX.7 LED_DR.2
N$49: DEMUX.6 LED_DR.3
N$50: DEMUX.5 LED_DR.4
N$51: DEMUX.4 LED_DR.5
N$52: DEMUX.3 LED_DR.6
N$53: LED_VOL12.A R16.1
N$54: LED_VOL13.A R17.1
N$55: LED_VOL14.A R18.1
N$56 [main2]: K3.P2 X3.3
N$57: LED_VOL15.A R19.1
N$58: LED_VOL16.A R20.1
N$59: K7.S1 OPT_SW.1
N$60: PCB2.16 SERIAL_COM1.1
N$61: PCB2.17 SERIAL_COM1.2
N$62: DEMUX.2 LED_DR.7
N$63: DEMUX.1 LED_DR.8
N$64: K4.S2 OPT_SW3.1
N$65 [main2]: K3.P1 X3.1
N$66: DEMUX.17 RARR4.4 SJ3.2
N$67 [power]: IN4.P1 RCA_IN_2.SLEEVE RCA_IN_2.SLEEVE1 RCA_IN_2.SLEEVE2
N$68 [power]: IN2A.P2 X_IN_2.2
N$69 [power]: IN2B.P2 X_IN_2.3
N$70: DEMUX.16 RARR4.3 SJ2.2
N$71: DEMUX.15 RARR4.2 SJ1.2
N$72 [power]: IN3.P2 RCA_IN_1.TIP
N$73 [mains]: 6V_TRF_PRIM.1 F1.2
N$74: K7.O1 OPT_SW.3
N$75: PCB2.A0 U$1.9
N$76 [power]: IN4.P2 RCA_IN_2.TIP
N$77: DEMUX.18 R_DEMUX.2
N$78: C23.2 R26.1
N$79: IC1.3 POT1.2
N$80: C24.+ IC1.7
N$81 [power]: IN2A.P1 IN2B.P1 X_IN_2.1
N$82 [power]: IN1A.P1 IN1B.P1 X_IN_1.1
N$83: DEMUX.21 RL_DR.8
N$84: PCB2.A1 U$1.10
N$85: PCB2.A2 U$5.9
N$86: PCB2.A3 U$5.10
N$87: DEMUX.22 RL_DR.7
N$88: DEMUX.23 RL_DR.6
N$89: DEMUX.24 RL_DR.5
N$90: DEMUX.25 RL_DR.4
N$91: DEMUX.26 RL_DR.3
N$92: DEMUX.27 RL_DR.2
N$93: DEMUX.28 RL_DR.1
N$94 [power]: K_ASS2.O2 X_OUT_6.2
N$95 [power]: K_ASS2.O1 X_OUT_6.3
N$96 [power]: K_ASS2.S2 RCA_OUT_1.TIP
N$97: LED_DR.17 RLED7.1
N$98: JP3.9 JP4.9 SJ8.2
N$99: JP3.10 JP4.10 SJ9.2
N$100: LED_DR.16 RLED1.1
N$101: LED_DR.18 RLED8.1
N$102: C29.2 IN2B.1
N$103 [power]: PWR1.1 PWR2.1 PWR.1
N$104 [power]: PWR1.3 PWR2.3 PWR.3
N$105 [power]: C_VOL_VCC_1.+ C_VOL_VCC_2.1 R_VCC.1 U$9.22 U$9.24
N$106 [power]: C_DCAP_1.1 C_DCAP_2.- C_VOL_VEE_1.- C_VOL_VEE_2.2 R_VEE.1 U$9.25 U$9.27
N$107: C_DCAP_1.2 C_DCAP_2.+ U$9.28
N$108: R_LATCH.1 U$9.20
N$109: C32.1 C33.1 R33.2 SW2.C
N$110: R_SCK.1 U$9.19
N$111: C31.1 R32.2 SW2.D
N$112: R_MOSI.1 U$9.18
N$113: RARR1.4 SJ5.2 U$9.30
N$114: C_DREF.2 R_VDD.1 U$9.17
N$115: R_DREF.1 U$9.21
N$116: C_REG2_-.1 TPS7A30.6
N$117: C_REG2_+.1 TPS7A49.6
N$118: C_VOL_IN1_+.1 C_VOL_IN2_+.1 R_VOL_IN1_+1.1 R_VOL_IN1_+.2 U$9.26
N$119: C_VOL_IN1_-.1 C_VOL_IN2_-.1 R_VOL_IN1_+2.1 R_VOL_IN1_-.2 U$9.23
N$120: R29.E R_VOL_IN1_+1.2
N$121: R30.E R_VOL_IN1_+2.2
N$122: C_FB_-.1 R_FB3.2 R_FB4.1 TPS7A30.2
N$123: K4.O2 OPT_SW3.3
N$124: C_FB_+.1 R_FB1.1 R_FB2.2 TPS7A49.2
N$125 [power]: C_REG1_-.- PRE_PWR.3 TPS7A30.5 TPS7A30.8 VOL_PWR1.3
N$126 [power]: C_REG1_+.+ PRE_PWR.1 TPS7A49.5 TPS7A49.8 VOL_PWR1.1
N$127: RARR1.3 SJ4.2 U$9.31
N$128: RARR1.5 SJ6.2 U$9.29
N$138: PWR_LED.1 R31.1
N$139 [mains]: K5.P1 X1.1 X2.1 X4.1 X5.1
N$141 [main2]: K5.P2 X1.3 X2.3 X4.3 X5.3
O_SPDIF: J8.3 USB/SPD.2
O_USB: J8.4 USB/SPD.1
OUT_EXT+ [power]: JP2.1 K_OUT_SEL.S1
OUT_EXT- [power]: JP2.3 K_OUT_SEL.S2
OUT_INT+ [power]: K_ASS2.P2 K_OUT_SEL.O1
OUT_INT- [power]: K_ASS2.P1 K_OUT_SEL.O2
OUT_VOL+ [power]: K_OUT_SEL.P1 POT1.3 VOLUME_OUT.1
OUT_VOL+1 [power]: U$9.3 X9.1
OUT_VOL- [power]: K_OUT_SEL.P2 R27.2 VOLUME_OUT.3
OUT_VOL-1 [power]: U$9.14 X9.3
PREAMP1_IN+ [power]: K_BYPASS_I.O1 TO_PREAMP.2
PREAMP1_IN- [power]: K_BYPASS_I.O2 TO_PREAMP.4
PREAMP1_OUT+ [power]: K_BYPASS_O.O1 TO_PREAMP.1
PREAMP1_OUT- [power]: K_BYPASS_O.O2 TO_PREAMP.5
PREAMP_IN+ [power]: TO_PREAMP1.2 X8.1
PREAMP_IN- [power]: TO_PREAMP1.4 X8.3
PREAMP_OUT+ [power]: R_VOL_IN1_+.1 TO_PREAMP1.1
PREAMP_OUT- [power]: R_VOL_IN1_-.1 TO_PREAMP1.5
PWM: JP3.7 JP4.7 Q2.G
PWM_EXT: PCB2.12 U$1.7 U$5.7
PWM_TFT: PCB2.13 U$3.LITE
R+: J3.3 RCA_OUT_3.TIP X_OUT_3.2
R-: J3.2 RCA_OUT_3.SLEEVE RCA_OUT_3.SLEEVE1 RCA_OUT_3.SLEEVE2 X_OUT_3.3
R_GND: J3.1 X_OUT_3.1
RIAA_IN+ [power]: RCA_IN_3.TIP RIAA.2
RIAA_OUT+ [power]: IN5.P2 RIAA.1
RIAA_OUT- [power]: IN5.P1 RIAA.5
RL1: C4.2 K5.2 RL_DR1.15
RL2: C6.2 K3.2 RL_DR1.14
RL3: C13.2 K7.10 RL_DR1.13
RL4: C2.2 K4.10 RL_DR1.12
RL5: C5.2 K1.10 RL_DR1.11
RO_ASYM: C34.1 C35.1 K_ASS1.1 K_ASS2.1 RL_DR.18
RO_OUT: C36.1 K_OUT_SEL.1 LED_DR.11
RS_ASYM: C17.1 K_ASS.1 RL_DR.11
RS_BYPASS: C18.2 C19.1 K_BYPASS_I.1 K_BYPASS_O.1 RL_DR.12
RS_IN1: C16.2 C30.2 IN1A.1 IN1B.1 RL_DR.13 RLED6.1
RS_IN2: C12.2 IN2A.1 RL_DR.14 RLED5.1
RS_IN3: C15.2 IN3.1 RL_DR.15 RLED4.1
RS_IN4: C10.2 IN4.1 RL_DR.16 RLED3.1
RS_IN5: C9.2 IN5.1 RL_DR.17 RLED2.1
RX: J8.1 J10.2
SCK: PCB2.52 U$1.5 U$3.SCK U$5.5
SCK1: DEMUX.12 JP3.5 JP4.5 VOLUME_BUS.5
SCK2: R_SCK.2 X6.5 X7.5
SCL: I2C.2 PCB2.21 R25.2
SDA: I2C.1 PCB2.20 R24.2
SELECTED+ [power]: JP1.2 K_ASS.P2
SELECTED- [power]: JP1.4 K_ASS.P1
SHIELD_L: J2.4 X_OUT_2.G
SHIELD_L1: J5.4 X_OUT_1.G
SHIELD_L2: J6.4 X_OUT_4.G
SHIELD_L3: J7.4 X_OUT_5.G
SHIELD_R: J3.4 X_OUT_3.G
SW_ENC1: C32.2 PCB2.2 R22.2 SW2.B
SW_ENC2: C33.2 PCB2.3 R23.2 SW2.A
SW_PUSH: C31.2 PCB2.19 R21.2 SW2.E
TFT_CS: PCB2.11 U$3.CS
TFT_INT: PCB2.18 U$3.INT
TFT_RST: PCB2.8 U$3.RST
TFT_WAIT: PCB2.9 U$3.WAIT
TFT_X+: PCB2.A6 U$3.X+
TFT_X-: PCB2.A7 U$3.X-
TFT_Y+: PCB2.A9 U$3.Y+
TFT_Y-: PCB2.A8 U$3.Y-
TO_PREAMP+ [power]: JP1.1 K_BYPASS_I.P1
TO_PREAMP- [power]: JP1.5 K_BYPASS_I.P2
TX: J8.2 J10.1
V_RECT [power]: C11.+ GBU6D.+ LM323T.1 OPT_SW4.1 R31.2
V_RECT1 [power]: K1.S1 U$1.1
V_RECT2 [power]: K1.S2 U$5.1
V_RECT_SEL [power]: K1.P1 K1.P2 OPT_SW4.2
VOL_CS: PCB2.6 U$1.4 U$5.4
VOL_CS1: JP3.4 JP4.4 VOLUME_BUS.4
VOL_CS2: R_LATCH.2 X6.4 X7.4
VU_METER: C23.1 IC1.5 SJ8.1 SJ9.1

## Tracks (layer width: path | path; a pad name or v marks a point on that pad's centre or on a via)
44.1KHZ  (via drill 0.4)
  Top 0.203: J4.10 261.85,61.6 260.58,62.87 260.58,123.32 v261.09,123.82
  Bottom 0.203: v261.09,123.82 264.13,126.87 J8.7
48KHZ
  Top 0.203: J4.9 261.85,128.65 263.88,130.68 264.9,130.68 265.66,129.92 265.66,125.6 J8.8
88.2KHZ
  Bottom 0.203: J4.8 264.39,61.6 263.12,62.87 263.12,111.38 262.61,111.89 262.61,118.49 J9.1
96KHZ
  Bottom 0.203: J4.7 264.39,62.61 265.66,61.34 265.66,60.32 266.42,59.56 267.44,59.56 268.2,60.32 268.2,113.92 J9.2
176.4KHZ
  Bottom 0.203: J4.6 266.93,61.6 265.66,62.87 265.66,110.62 264.9,111.38 263.88,111.38 263.12,112.14 263.12,113.92 J9.3
192KHZ
  Bottom 0.203: J4.5 266.93,110.11 J9.4
+5V
  Top 0.508: 26.77,54.74 35.03,62.99 35.28,62.99 R23.1 | 26.77,54.74 26.64,54.61 21.56,54.61 R21.1 | 26.77,54.74 26.9,54.61 26.9,43.69 35.03,35.56 R22.1 | 93.95,31.75 93.95,28.7 R25.1 | 93.95,31.75 R24.1 93.95,31.75 | LED_DR1.10 94.46,63.75 96.49,65.79 C7.1 | 94.59,45.34 95.99,46.74 C3.1 | 94.59,45.34 94.46,45.21 94.46,44.7 LED_DR2.10 | 92.68,45.47 94.46,45.47 94.59,45.34 | 92.68,45.47 83.03,45.47 79.22,49.28 78.71,49.28 IR1.VO | 93.95,31.75 93.95,32.51 92.68,33.78 92.68,45.47 | C6.1 221.21,67.06 221.21,62.48 222.22,61.47 K3.1 | U$3.VIN 195.55,76.96 195.55,70.1 192.76,67.31 C4.1 192.76,67.06 192.76,61.98 193.27,61.47 K5.1 192.76,61.72 189.2,61.72 178.54,51.05 164.31,51.05 162.79,49.53 LM323T.3 | PCB2.5V. 122.91,23.62 125.2,23.62 PCB2.5V.. | 133.58,31.24 133.58,32.26 134.59,33.27 C2.1 134.59,33.53 132.82,35.31 J1.1 | 133.58,31.24 133.58,29.97 K4.1 | 145.77,31.24 145.77,32 147.04,33.27 C13.1 147.29,33.53 147.29,41.15 | 145.77,31.24 145.77,29.97 K7.1 | 144.75,59.44 138.66,59.44 138.15,59.94 C14.+ | 144.75,59.44 145.52,59.44 C8.1 144.75,59.44 | OPT_SW4.3 156.95,35.31 157.33,35.69 | K1.1 157.33,35.69 | 144.88,40.51 144.25,39.88 144.25,39.62 C1.1 | 144.88,40.51 145.64,41.27 | 145.64,41.27 146.28,41.91 RL_DR1.10 | 147.29,41.15 145.77,41.15 145.64,41.27 | 147.29,41.15 151.87,41.15 | 151.87,41.15 C5.1 151.87,41.15 | 151.87,41.15 157.2,35.81 157.33,35.69 | 144.75,59.44 144.75,40.64 144.88,40.51 | 133.58,31.24 145.77,31.24
  Bottom 0.508: R22.1 35.28,35.56 39.6,35.56 50.01,25.15 51.28,25.15 52.55,23.88 PCB2.AREF | 69.19,69.72 73.63,65.28 74.9,65.28 78.46,61.72 78.46,49.53 IR1.VO | 69.19,69.72 67.03,71.88 PCB2.5V | C7.1 96.49,65.79 96.49,46.99 96.24,46.74 C3.1 | R23.1 35.53,62.99 43.66,62.99 45.19,64.52 62.97,64.52 63.73,65.28 64.74,65.28 69.06,69.6 69.19,69.72 | C6.1 220.95,67.31 217.65,67.31 216.38,68.58 194.03,68.58 192.76,67.31 C4.1 | K1.1 159.49,37.85 159.49,45.72 162.53,48.77 162.53,49.28 LM323T.3 | PCB2.5V.. 125.45,23.88 127.23,23.88 133.32,29.97 K4.1 | R25.1 93.95,28.7 102.34,28.7 103.61,29.97 116.56,29.97 122.66,23.88 PCB2.5V.
+5V1
  Top 0.381: 292.33,123.57 288.01,123.57 LED_IN1.A 287.76,123.57 287.76,122.81 285.72,120.78 285.72,96.65 287.76,94.61 LED_IN2.A 288.01,94.36 292.33,94.36 | 292.33,123.57 LED_IN1B.A | 292.33,123.57 LED_IN1B.A | 292.33,123.57 LED_IN1B.A | 292.33,94.36 LED_IN1B1.A | 292.33,94.36 LED_IN1B1.A | 292.33,94.36 LED_IN1B1.A
  Bottom 0.381: 256.01,122.81 256.01,122.3 5V_PWR1.1 | 256.01,122.81 256.01,154.81 5V_PWR.1 | 256.01,122.81 264.9,122.81 266.67,124.59 283.95,124.59 284.71,123.82 287.76,123.82 LED_IN1.A
+5V2  (via drill 0.2)
  Top 0.381: R_DEMUX.1 68.68,95 70.08,96.39 70.08,102.87 69.44,103.5 68.81,103.5 DEMUX.9 69.57,103.63 70.97,105.03 70.97,115.7 | 70.97,115.7 70.97,116.84 C21.2 | LED_DR.10 55.09,113.66 55.09,114.43 56.87,116.2 C22.2 | C20.2 88.87,116.46 85.57,116.46 84.43,117.6 78.59,117.6 76.68,115.7 71.09,115.7 70.97,115.7 | RL_DR.10 90.65,103.38 90.65,101.6 87.48,98.42 RARR4.1 | v124.43,93.98 124.82,94.36 138.02,94.36 147.68,104.01 151.1,104.01 C26.2
  Bottom 0.381: VOLUME_BUS.1 169.27,89.53 171.3,87.5 179.93,87.5 180.82,88.39 180.82,91.19 171.93,100.08 163.04,100.08 C25.+ 162.92,100.33 159.99,100.33 156.31,104.01 153.39,104.01 | 153.39,104.01 151.23,104.01 C26.2 | 24.61,117.6 23.09,116.08 C28.+ | 24.61,117.6 27.66,120.65 28.93,120.65 C27.1 | 24.61,117.6 24.74,117.47 24.74,109.85 LM323T1.3 24.87,109.6 26.01,108.46 26.01,108.33 29.31,105.03 46.84,105.03 58.01,116.2 58.01,116.33 | 58.01,116.33 60.3,116.33 61.44,117.47 70.46,117.47 70.97,116.97 C21.2 | 58.01,116.33 57,116.33 C22.2 | IC1.6 152.25,110.24 152.25,109.35 153.39,108.2 153.39,104.14 153.39,104.01 | R_DEMUX.1 68.68,95 70.97,97.28 83.41,97.28 84.43,98.3 87.35,98.3 RARR4.1 87.48,98.55 88.75,99.82 98.02,99.82 103.86,93.98 v124.43,93.98
+5V3
  Top 0.381: C_DCAP_5.+ 204.19,89.92 204.19,91.57 206.48,93.85 R_VDD.2 206.35,93.47 209.65,90.17 C37.+
  Bottom 0.381: X6.1 198.09,104.9 206.48,96.52 | 206.48,96.52 206.48,93.98 R_VDD.2 | X7.1 240.89,104.78 235.43,104.78 230.73,104.78 214.73,104.78 206.6,96.65 206.48,96.52
  Bottom 0.406: RARR1.1 231.45,123.62 231.88,123.19 231.88,108.33 235.43,104.78
+5V_RAW
  Top 0.381: LM323T1.1 29.95,109.73 31.72,109.73 55.98,85.47 130.53,85.47 JP3.1 134.34,89.28 134.34,92.46 JP4.1
A_VCC
  Top 0.381: C_FB_+.2 240.77,128.65 239.75,128.65 239.62,128.52 238.61,128.52 TPS7A49.1 238.48,128.4 238.48,124.84 C_REG1_+1.+ 238.61,124.71 241.4,121.92 241.53,121.79 | 241.53,121.79 242.8,123.06 R_FB1.2 | 241.53,121.79 241.15,121.41 241.15,117.86 R_VCC.2
A_VEE
  Top 0.381: C_FB_-.2 205.59,126.75 205.59,125.73 206.35,124.97 TPS7A30.1 | C_FB_-.2 205.59,127 207.62,129.03 C_REG1_-1.- 207.11,128.78 | 203.17,130.17 R_FB4.2 203.3,130.05 203.3,129.16 204.83,127.63 C_FB_-.2 | 212.45,126.62 205.71,126.62 C_FB_-.2
  Top 0.406: 212.45,126.62 212.7,126.62 213.33,125.98 213.33,120.28 R_VEE.2
  Bottom 0.381: 213.59,120.14 R_VEE.2
AUDIOSTREAM
  Top 0.203: J4.3 269.47,72.52 263.12,78.87 263.12,128.14 J8.6
BYPASS+
  Bottom 0.381: K_BYPASS_O.S1 59.54,132.46 62.59,132.46 63.86,133.73 71.35,133.73 72.62,132.46 K_BYPASS_I.S1
BYPASS-
  Top 0.381: K_BYPASS_O.S2 51.92,132.46 57,132.46 58.27,133.73 63.73,133.73 65,132.46 K_BYPASS_I.S2
EARTH  (via drill 0.4)
  Top 1.27: X1.2 217.65,15.75 217.65,26.67 X2.2 | X11.2 232.13,45.21 234.16,45.21 237.46,41.91 237.46,30.73 232.89,26.16 232.13,26.16 X3.2 | v226.54,55.12 226.54,60.45 229.59,63.5 231.88,63.5 6V_TRF_PRIM.2 | v204.44,14.99 204.44,13.97 201.65,11.18 199.11,11.18 195.3,14.99 195.3,15.49 X4.2
  Bottom 1.27: X3.2 231.88,25.91 227.3,25.91 223.75,22.35 221.21,22.35 217.65,25.91 217.65,26.67 X2.2 217.91,24.89 214.1,21.08 210.54,21.08 v204.44,14.99 | v226.54,55.12 226.54,48.51 229.59,45.47 231.88,45.47 X11.2 | U$1.8 34.26,13.97 37.82,17.53 51.28,17.53 57.38,11.43 74.65,11.43 76.05,12.83 | 76.05,12.83 76.17,12.95 U$5.8 | R1.2 176.76,37.08 185.65,28.19 185.65,24.13 187.55,22.23 | 187.55,22.23 188.44,21.34 191.74,21.34 194.67,24.26 | 194.67,24.26 195.05,24.64 195.05,26.67 X5.2 | X4.2 195.05,15.75 195.05,23.88 194.67,24.26 | 76.05,12.83 76.43,12.45 78.21,10.67 176,10.67 187.17,21.84 187.55,22.23
EARTH1  (via drill 0.2)
  Top 0.203: v71.98,141.6 71.98,141.86 68.68,145.16 41.88,145.16 41.25,144.53 X_OUT_6.G | JP3.8 151.99,92.46 JP4.8
  Bottom 0.203: v71.98,141.6 T1.P 82.52,145.29 84.81,145.29 86.21,146.69 86.21,148.97 85.83,149.35 85.83,151.26 88.37,153.8 88.37,154.43 89.64,155.7 127.86,155.7 133.2,150.37 X_IN_2.G 133.32,150.37 136.12,150.37 | 136.12,150.37 154.66,150.37 155.04,150.75 163.3,150.75 163.68,150.37 X_IN_1.G | 136.12,150.37 136.12,143.89 137.01,143 140.44,143 142.98,140.46 142.98,121.16 147.42,116.71 147.42,106.17 151.99,101.6 151.99,92.58 JP4.8
GND  (via drill 0.4)
  Top 0.508: v39.85,38.1 34.77,33.02 R5.2 | 45.44,55.12 45.44,38.35 R33.1 | 45.44,55.12 45.44,60.2 R32.1 | v52.55,60.71 47.47,65.79 45.69,65.79 R6.2 | v27.66,19.56 U$1.3 | PCB2.GND. 71.86,71.88 69.57,71.88 PCB2.GND.. 69.57,71.63 67.03,69.09 v67.03,55.12 | SERIAL_COM.3 96.24,13.46 97.51,12.19 99.8,12.19 | 99.8,12.19 102.34,12.19 102.46,12.32 | SERIAL_COM1.3 102.46,12.32 | 114.15,12.57 113.77,12.19 102.59,12.19 102.46,12.32 | 114.15,12.57 115.04,13.46 115.54,13.46 I2C.3 | IR_LED_OUT.K 126.97,13.72 126.21,13.72 124.94,12.45 114.27,12.45 114.15,12.57 | 101.57,65.79 103.23,64.13 | 103.23,64.13 103.61,63.75 LED_DR1.9 103.86,63.75 114.27,63.75 v125.2,74.68 | 101.57,65.79 C7.2 101.57,65.79 | 102.21,45.85 101.32,46.74 C3.2 101.57,46.74 101.57,62.48 103.1,64.01 103.23,64.13 | 102.21,45.85 103.35,44.7 LED_DR2.9 | 99.8,12.19 99.8,19.81 v101.32,21.34 | v101.83,30.99 101.83,32.51 102.08,32.77 102.08,45.72 102.21,45.85 | v99.54,73.41 99.54,67.82 101.57,65.79 | v61.95,55.12 45.44,55.12 | PCB2.GND... 122.91,66.8 125.2,66.8 PCB2.GND.... | RL_DR1.9 137.13,41.91 139.17,39.88 139.17,39.62 C1.2 | PWR_LED.3 162.03,13.46 162.03,22.1 163.3,23.37 GBU6D.- | U$5.3 62.97,13.46 60.93,15.49 55.09,15.49 52.81,13.21 52.81,12.19 55.09,9.91 161.77,9.91 v164.31,12.45 164.31,12.19 176.5,12.19 177.52,13.21 177.52,16 176.76,16.76 R1.1 | C8.2 145.52,64.52 145.52,66.8 146.28,67.56 183.62,67.56 193.01,76.96 U$3.GND | v139.93,76.96 136.88,73.91 135.1,73.91 C11.- | v144.25,76.96 144.25,75.69 v147.29,72.64
  Bottom 0.508: 192.51,76.96 193.01,76.96 U$3.GND | LM323T.2 159.99,49.53 162.28,51.82 167.36,51.82 167.74,52.2 167.61,52.32 v147.29,72.64 | v39.85,38.1 45.19,38.1 R33.1 | v52.55,60.71 46.2,60.71 45.69,60.2 R32.1 | v27.66,19.56 31.72,19.56 34.52,22.35 34.52,33.02 R5.2 | 74.78,69.22 72.11,71.88 PCB2.GND. | 74.78,69.22 81,62.99 81,49.53 IR1.VS | v125.2,74.68 129.51,74.68 130.28,73.91 134.85,73.91 C11.- | v101.32,21.34 97.76,21.34 92.68,26.42 92.68,29.21 93.45,29.97 99.29,29.97 99.54,29.72 100.56,29.72 v101.83,30.99 | v99.54,73.41 78.97,73.41 74.9,69.34 74.78,69.22 | v67.03,55.12 v61.95,55.12 | R1.1 176.76,35.05 170.66,41.15 170.66,54.86 | v164.31,12.45 162.79,12.45 162.03,13.21 PWR_LED.3 | v144.25,76.96 v139.93,76.96
  pour Top: 2.01,82.3 178.54,82.3 178.54,8.64 2.01,8.64
  pour Bottom: 2.01,82.3 178.54,82.3 178.54,8.64 2.01,8.64
GND1
  Top 0.381: 165.96,121.92 165.96,124.46 IN1B.10 | 165.96,121.92 167.11,120.78 C16.1 167.23,120.52 175.36,112.39 C30.1 | C30.1 174.85,112.27 175.62,112.27 179.3,115.95 IN1A.10 | 174.35,105.28 174.35,111.63 174.73,112.01 C30.1 | 174.35,105.28 VOLUME_BUS.3 | 153.26,121.92 153.26,124.46 IN2A.10 | 153.39,121.79 154.41,120.78 C12.1 | 153.39,121.79 153.26,121.92 | JP3.3 139.29,92.46 JP4.3 | 140.69,121.79 141.71,120.78 C29.1 | 140.69,121.79 140.56,121.92 140.56,124.46 IN2B.10 | 153.26,121.92 153.14,121.92 140.82,121.92 140.69,121.79 | 163.17,121.92 153.52,121.92 153.39,121.79 | 163.17,121.92 165.84,121.92 165.96,121.92 | 19.02,122.56 19.02,122.17 20.17,121.03 C35.2 | 19.02,122.56 19.02,123.57 | 19.02,123.57 19.02,124.71 K_ASS1.10 | 31.6,123.57 31.6,122.17 32.74,121.03 C34.2 | 31.6,123.57 31.6,124.71 K_ASS2.10 | 19.02,123.57 19.15,123.57 31.47,123.57 31.6,123.57 | K_OUT_SEL.10 6.2,122.05 6.32,121.92 | C36.2 6.32,121.92 | 19.02,122.56 18.9,122.56 15.09,122.56 14.58,122.05 6.45,122.05 6.32,121.92 | R28.2 82.65,143.64 83.29,143.64 86.33,140.59 Q2.S 86.46,140.34 86.46,136.4 88.75,134.11 88.75,126.49 90.65,124.59 IN5.10 | IN3.10 127.99,124.33 127.99,121.79 129.13,120.65 C15.1 | 163.17,121.92 163.17,121.79 163.17,116.33 R26.2 163.04,116.2 162.66,115.82 158.34,115.82 C24.- | C25.- 163.04,105.28 174.22,105.28 174.35,105.28 | SJ3.1 95.1,94.49 92.56,94.49 SJ2.1 92.3,94.49 89.64,94.49 SJ1.1 89.51,94.61 89,94.61 81.38,102.23 81.38,103.38 RL_DR.9 81.51,103.5 82.02,103.5 83.67,105.16 83.67,116.2 83.79,116.33 C20.1 | C28.- 20.55,115.95 21.31,115.95 22.58,114.68 28.04,114.68 28.93,115.57 C27.2 | 62.08,113.66 62.08,116.2 C22.1 62.2,116.33 66.27,120.4 66.27,120.9 C18.1
  Top 0.381: 62.08,113.66 62.08,103.89 63.22,102.74 66.65,102.74 67.03,102.36 68.68,102.36 DEMUX.10 | LED_DR.9 64.36,113.66 62.2,113.66 62.08,113.66
  Bottom 0.381: 139.42,118.36 139.42,107.7 | 139.42,107.7 139.42,92.58 JP4.3 | 139.42,118.36 141.71,120.65 C29.1 | 139.42,118.36 139.29,118.49 134.59,118.49 132.56,120.52 129.26,120.52 C15.1 129.01,120.52 121.39,120.52 116.81,115.95 108.69,115.95 108.56,116.08 | C36.2 8.86,119.38 8.86,107.82 6.96,105.92 6.71,105.92 JP2.4 | 57.63,124.21 58.27,123.57 63.86,123.57 63.98,123.7 | 57.63,124.21 57.12,124.71 51.92,124.71 K_BYPASS_O.10 51.79,124.59 49.76,124.59 48.11,122.94 38.2,122.94 36.3,121.03 32.87,121.03 C34.2 32.74,120.78 29.06,117.09 29.06,115.7 C27.2 28.93,115.57 27.41,114.05 27.41,109.85 LM323T1.2 | 63.98,123.7 65,124.71 K_BYPASS_I.10 | 66.4,123.57 64.11,123.57 63.98,123.7 | 66.4,123.57 73.89,123.57 75.03,124.71 77.7,124.71 K_ASS.10 77.83,124.59 78.84,123.57 | 78.84,123.57 86.59,123.57 87.48,124.46 90.65,124.46 IN5.10 90.91,124.46 91.54,123.82 | 108.56,116.08 109.19,116.71 109.19,120.14 108.31,121.03 105.51,121.03 103.23,123.32 92.05,123.32 91.54,123.82 | 108.56,116.08 108.43,115.95 | 108.43,115.95 107.16,114.68 IN4.10 | 142.6,107.7 139.55,107.7 139.42,107.7 | 142.6,107.7 144.5,107.7 IC1.4 | C26.1 146.02,104.14 142.6,107.57 142.6,107.7 | C19.2 53.19,121.03 54.46,121.03 57.51,124.08 57.63,124.21 | C18.1 66.4,121.03 66.4,123.44 66.4,123.57 | C10.1 108.56,110.87 108.56,115.82 108.43,115.95 | C17.2 78.97,121.03 78.97,123.44 78.84,123.57 | C9.1 91.41,120.78 91.41,123.7 91.54,123.82 | C21.1 76.17,116.97 76.17,117.98 78.97,120.78 C17.2 | C20.1 83.79,116.46 79.1,121.16 C17.2
GND2
  Top 0.381: C_DCAP_5.- 204.19,88.01 209.27,88.01 209.65,87.63 C37.- | X7.3 240.77,99.82 238.1,102.49 231.62,102.49 226.67,107.44 226.67,113.79 226.8,113.79 227.05,113.79 R_PROTECT.2
  Bottom 0.381: X7.3 240.77,99.82 235.05,94.11 234.29,94.11 R_DREF.2 234.04,93.98 228.32,93.98 224.13,89.79 211.94,89.79 209.78,87.63 C37.- | C_DCAP_5.- 204.06,88.14 202.92,89.28 202.92,95 198.09,99.82 X6.3 197.71,99.69 195.55,101.85 195.55,123.95 196.7,125.09 196.7,134.49 C_DREF.1
GND_5V
  Top 0.203: J10.3 272.52,154.81 272.52,145.67 266.17,139.32 266.17,106.81 J9.7 J9.8
  pour Top: 294.74,156.72 294.74,58.29 246.61,58.29 246.61,156.72
  pour Bottom: 294.74,156.72 294.74,58.29 246.61,58.29 246.61,156.72
GND_AUDIO  (via drill 0.2, 0.4)